# Altium PCB PCB.PcbDoc
Units mil, origin at the board's own origin, x right, y up, seen from the top; angles counter-clockwise.
Board outline 866.77 x 1869 mil, 2 copper layers (Top Layer, Bottom Layer); 32 components, 42 nets, 192 pads, 54 vias.
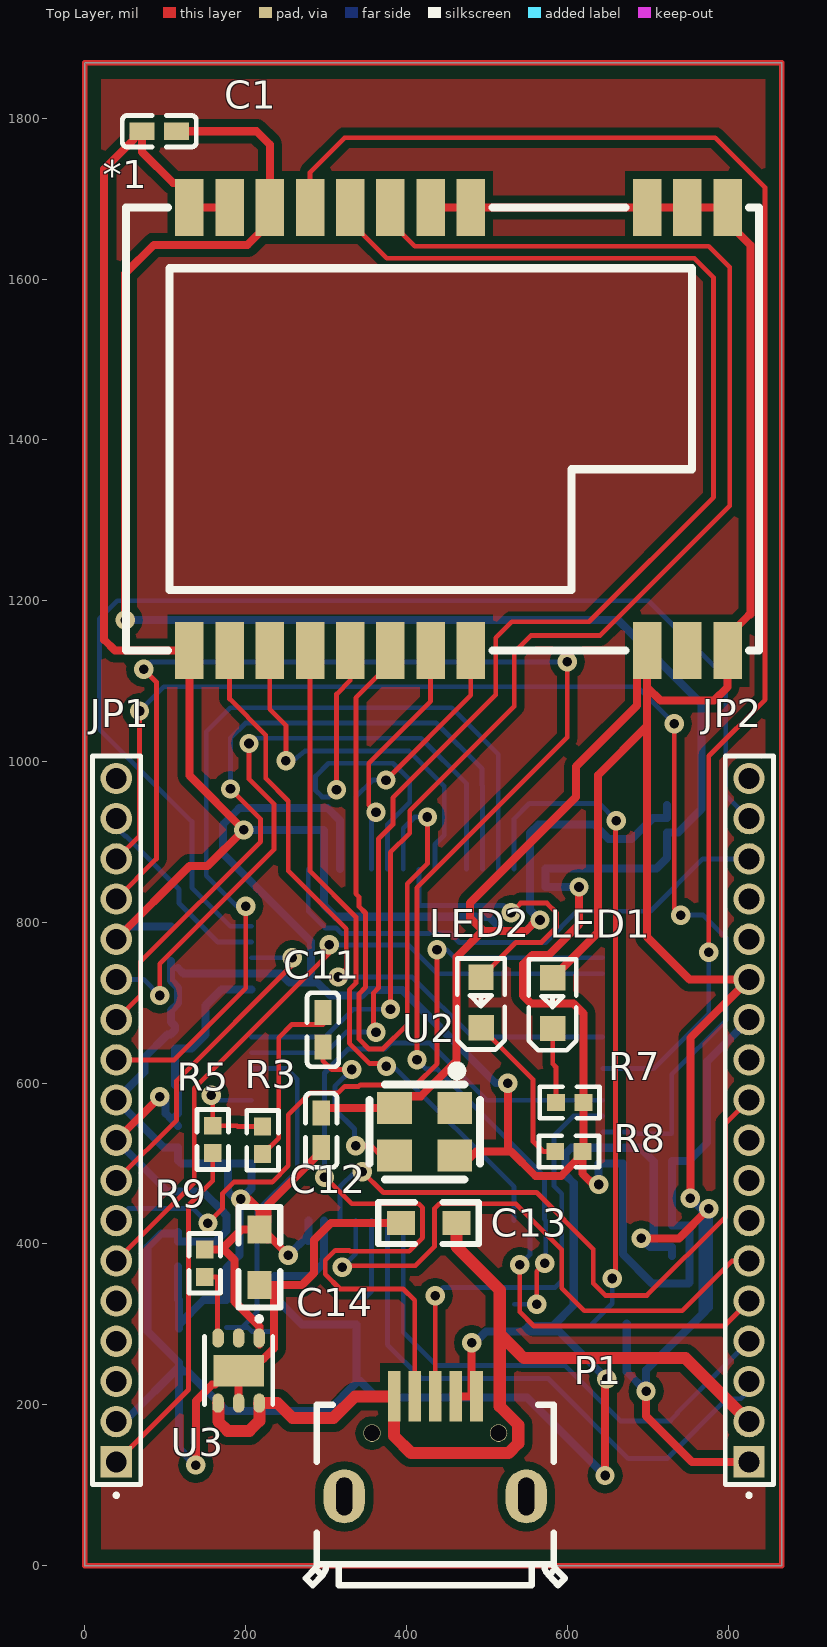
[diagram p0: Top Layer view]
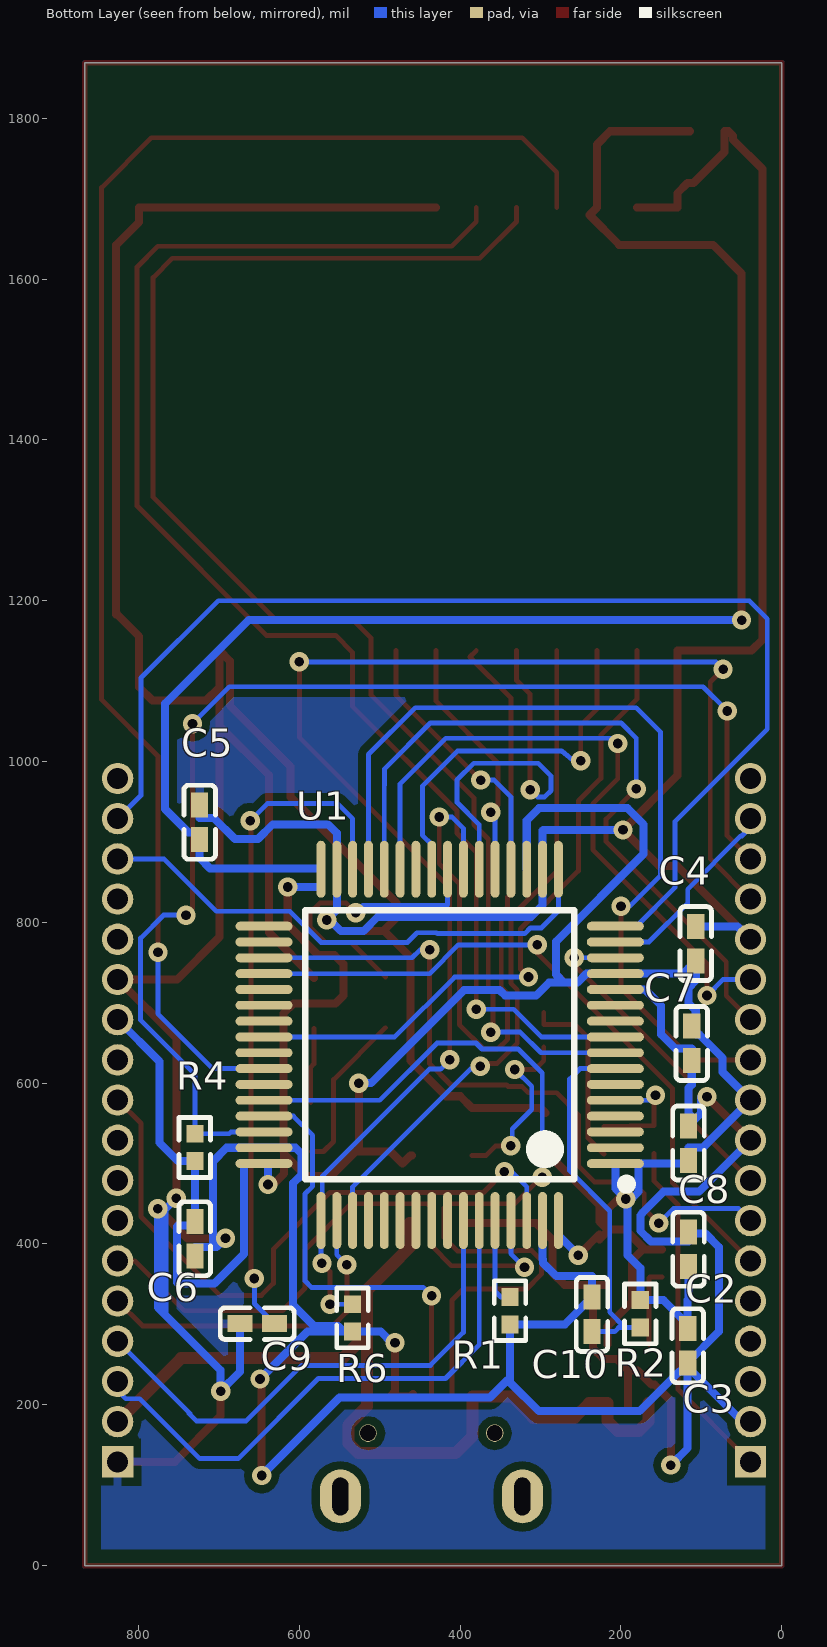
[diagram p1: Bottom Layer view, seen from below]

## Layer stack, top to bottom
Top Solder: solder mask 0.4, Solder Resist, Dk 3.5
Top Layer: signal copper 1.4
Dielectric 1: dielectric 12.6, FR-4, Dk 4.8
Bottom Layer: signal copper 1.4
Bottom Solder: solder mask 0.4, Solder Resist, Dk 3.5

## Board outline
0,0 0,1869 866.77,1869 866.77,0

## Design rules (kind name [scope] priority, off if disabled: settings)
Clearance [All] p1: gap=6 ignorepadtopadclearanceinfootprint=FALSE except(10: Arc-Poly Track-Poly SMDPad-Poly THPad-Poly Via-Poly Fill-Poly Poly-Poly)
MinimumSolderMaskSliver [All] p1: minsoldermaskwidth=0
PolygonConnect [All] p1: thpad.connectstyle=Relief thpad.reliefconductorwidth=10 thpad.reliefentries=4 thpad.polygonreliefangle="90 Angle" thpad.airgapwidth=10 smdpad.connectstyle=Relief smdpad.reliefconductorwidth=10 smdpad.reliefentries=4 smdpad.polygonreliefangle="90 Angle" smdpad.airgapwidth=10 via.connectstyle=NoConnect via.reliefconductorwidth=10 via.reliefentries=4 via.polygonreliefangle="90 Angle" via.airgapwidth=10
RoutingVias [All] p1: holewidth=12 width=24 viastyle="Through Hole" minholewidth=11 minwidth=27 maxholewidth=15 maxwidth=23
SilkToSilkClearance [All] p1: silktosilkclearance=0
SilkToSolderMaskClearance [IsPad] p1: minsilkscreentomaskgap=0 clearancetoexposedcopper=TRUE
SolderMaskExpansion [All] p1: expansion=4
Width Width_2 [(InNet('GND') OR InNet('VCC3V3'))] p1: maxlimit=10 minlimit=10 preferedwidth=10
Width Width_1 [InNet('+5V')] p2: maxlimit=18 minlimit=10 preferedwidth=15
Width [All] p3: maxlimit=10 minlimit=5 preferedwidth=6 minimp=50.000000 maximp=50.000000 favimp=50.000000
27 further rules are at their usual default settings.

## Components (designator, comment, footprint, x,y, rotation, side; value= is the part's Value field where it differs from the comment)
*1 "400M22S" E22_400M22S 663.66,1217.57 r90 top
C1 "0.1uF" "C 0402" 198.53,1816.37 r0 top
C2 "10uF" "C 0402" 83.63,287.55 r270 bottom
C3 "100mF" "C 0402" 149.37,379.45 r90 bottom
C4 "100mF" "C 0402" 74.63,667.55 r270 bottom
C5 "100mF" "C 0402" 691.63,818.55 r270 bottom
C6 "100mF" "C 0402" 762.37,512.53 r90 bottom
C7 "100mF" "C 0402" 144.37,755.45 r90 bottom
C8 "100mF" "C 0402" 83.63,419.55 r270 bottom
C9 "4.7uF" "C 0402" 546.47,333.37 r180 bottom
C10 "100mF" "C 0402" 268.37,418.45 r90 bottom
C11 "0.1uF" "C 0402" 263.63,772.45 r90 top
C12 "0.1uF" "C 0402" 326.37,435.47 r270 top
C13 "1uF" "C 0603" 428,426 r0 top
C14 "1uF" "C 0603" 217,384 r90 top
JP1 "HDR-1X14" "18p 1.27" -18285.63,22035.16 r90 top locked
JP2 "HDR-1X14" "18p 1.27" -17498.63,22035.16 r90 top locked
LED1 "LED" LED 504.18,607.88 r90 top
LED2 "LED" LED 415.18,608.88 r90 top
P1 "MICRO_USB" mircoUSB2 506,251.8 r90 top
R1 "1K" "R 0402" 370.37,336.87 r90 bottom
R2 "1K" "R 0402" 143.63,293.21 r270 bottom
R3 "0" "R 0402" 188.63,548.78 r90 top
R4 "10K" "R 0402" 697.63,500.22 r270 bottom
R5 "1K" "R 0402" 126.63,549.78 r90 top
R6 "10K" "R 0402" 501.63,288.21 r270 bottom
R7 "1K" "R 0402" 622.78,608.37 r0 top
R8 "1K" "R 0402" 621.86,547.37 r0 top
R9 "10K" "R 0402" 116.63,395.86 r90 top
U1 "STM32F412RET6" LQFP-64_10X10X05P 425.5,647.64 r0 bottom
U2 "TG2520SMN" TG25 311.49,576.34 r180 top
U3 "LP5912" lp5912 191.21,242.54 r270 top

## Footprints (in the part's own frame and the unit in brackets; to place one, negate y for a bottom-side part, rotate by r counter-clockwise, add the part's x,y. Pads: shape width x height; smd on the part's side, far side on the other; paste and mask are expansions set on the pad)
"18p 1.27" [mm]
  rect 0.99x0.99 hole 0.66: 1(-556.416,-465.446)
  round 0.99 hole 0.66: 2(-555.146,-465.446) 3(-553.876,-465.446) 4(-552.606,-465.446) 5(-551.336,-465.446) 6(-550.066,-465.446) 7(-548.796,-465.446) 8(-547.526,-465.446) 9(-546.256,-465.446) 10(-544.986,-465.446) 11(-543.716,-465.446) 12(-542.446,-465.446) 13(-541.176,-465.446) 14(-539.906,-465.446) 15(-538.636,-465.446) 16(-537.366,-465.446) 17(-536.096,-465.446) 18(-534.826,-465.446)
  silkscreen extent -557.53,-466.22 -534.12,-464.69
"C 0402" [mm]
  rect 0.79x0.54 smd: 1(-3.237,-0.822) 2(-2.147,-0.822)
  silkscreen extent -3.86,-1.32 -1.52,-0.32
"C 0603" [mil] "无极性贴片电容"
  rect 35x30 smd: 1(-35,0) 2(34,0)
  silkscreen extent -63,-26 62,26, body extent -31,-16 31,16, height 32
E22_400M22S [mm]
  rect 1.8x0.9 smd: 1(11.979,-3.445) 2(11.979,-2.175) 3(11.979,-0.905) 4(11.979,4.665) 5(11.979,5.935) 6(11.979,7.205) 7(11.979,8.475) 8(11.979,9.745) 9(11.979,11.015) 10(11.979,12.285) 11(11.979,13.555) 12(-2.021,13.555) 13(-2.021,12.285) 14(-2.021,11.015) 15(-2.021,9.745) 16(-2.021,8.475) 17(-2.021,7.205) 18(-2.021,5.935) 19(-2.021,4.665) 20(-2.021,-0.905) 21(-2.021,-2.175) 22(-2.021,-3.445)
  silkscreen extent -2.02,-4.45 11.98,15.55
LED [mm]
  rect 0.8x0.8 smd: 1(1.527,-1.977) 2(3.126,-1.97)
  silkscreen extent 0.84,-2.72 3.72,-1.22
lp5912 [mm]
  oval 0.607x0.364 smd: 1(-1.029,0.65) 2(-1.029,0) 3(-1.029,-0.65) 4(1.028,-0.65) 5(1.028,0) 6(1.028,0.65)
  rect 1x1.6 smd: 7(0,0)
  silkscreen extent -1.71,-1.08 1.08,1.08
LQFP-64_10X10X05P [mm]
  oval 1.8x0.28 smd: 1(-5.55,3.75) 2(-5.55,3.25) 3(-5.55,2.75) 4(-5.55,2.25) 5(-5.55,1.75) 6(-5.55,1.25) 7(-5.55,0.75) 8(-5.55,0.25) 9(-5.55,-0.25) 10(-5.55,-0.75) 11(-5.55,-1.25) 12(-5.55,-1.75) 13(-5.55,-2.25) 14(-5.55,-2.75) 15(-5.55,-3.25) 16(-5.55,-3.75) 33(5.55,-3.75) 34(5.55,-3.25) 35(5.55,-2.75) 36(5.55,-2.25) 37(5.55,-1.75) 38(5.55,-1.25) 39(5.55,-0.75) 40(5.55,-0.25) 41(5.55,0.25) 42(5.55,0.75) 43(5.55,1.25) 44(5.55,1.75) 45(5.55,2.25) 46(5.55,2.75) 47(5.55,3.25) 48(5.55,3.75)
  oval 0.28x1.8 smd: 17(-3.75,-5.55) 18(-3.25,-5.55) 19(-2.75,-5.55) 20(-2.25,-5.55) 21(-1.75,-5.55) 22(-1.25,-5.55) 23(-0.75,-5.55) 24(-0.25,-5.55) 25(0.25,-5.55) 26(0.75,-5.55) 27(1.25,-5.55) 28(1.75,-5.55) 29(2.25,-5.55) 30(2.75,-5.55) 31(3.25,-5.55) 32(3.75,-5.55) 49(3.75,5.55) 50(3.25,5.55) 51(2.75,5.55) 52(2.25,5.55) 53(1.75,5.55) 54(1.25,5.55) 55(0.75,5.55) 56(0.25,5.55) 57(-0.25,5.55) 58(-0.75,5.55) 59(-1.25,5.55) 60(-1.75,5.55) 61(-2.25,5.55) 62(-2.75,5.55) 63(-3.25,5.55) 64(-3.75,5.55)
  silkscreen extent -6.05,-4.25 4.25,4.55
mircoUSB2 [mm]
  rect 1.6x0.4 smd: 1(-1.047,3.083) 2(-1.047,2.433) 3(-1.047,1.783) 4(-1.047,1.133) 5(-1.047,0.483)
  oval 1.7x1.3 hole 0.5 slot 1.2 at 0 deg: SH1(-4.211,-1.092) SH2(-4.211,4.658)
  round 0.55 hole 0.5: SH3(-2.211,-0.217) SH4(-2.211,3.783)
  silkscreen extent -7.01,-2.31 -1.31,5.88
"R 0402" [mm]
  rect 0.566x0.54 smd: 1(-0.936,-0.822) 2(-0.071,-0.822)
  silkscreen extent -1.45,-1.32 0.44,-0.32
TG25 [mm]
  rect 1.1x1 smd: 1(-3.772,0.185) 2(-1.872,0.185) 3(-1.872,1.685) 4(-3.772,1.685)
  silkscreen extent -4.57,-1.14 -1.07,2.44

## Part data
C1 C2 C3 C4 C5 C6 C7 C8 C9 C10 C11 C12 C13 C14: library part C, "无极性贴片电容", 学习资源=www.o
JP1 JP2: library part "Header 18", "18P接插件", BOM名称=14, 学习资源=www.o
LED1 LED2: "贴片LED", 学习资源=www.o
R1 R2 R3 R4 R5 R6 R7 R8 R9: library part R, "贴片电阻", 学习资源=www.o
U1: library part STM32F412RET6_2

## Via types
v1: diameter 24, hole 12, Top Layer to Bottom Layer, 54 vias

## Nets (pads, with @x,y where several pads share a name; then routed paths per layer and width w, separated by ;. In a path a pad name is that pad's centre, name@x,y a point inside that pad or via, vN(x,y) a via of type N, cw(c..) or ccw(c..) an arc to the next point about the centre after c; other vN are vias at no path point)
1PPS_IN: JP2.5 U1.50 | length 423.9
  Top Layer w6: v1(540.95,374) 540.95,315.55 558.5,298 795,298 JP2.5
  Bottom Layer w6: v1(540.95,374) 553.45,386.5 U1.50
+5V: C13.2 JP2.2 P1.1 U3.4 U3.6 | length 1182.9
  Top Layer w15: U3.4 165.95,201.71 165.95,179.05 177.5,167.5 204.5,167.5 217,180 217,198 U3.6 239.65,202.05 257.97,183.73 309.23,183.73 336.07,210.57 P1.1 384.63,161 405.63,140 527,140 539,152 539,175 516,198 516,288 ; C13.2@470.39,418.5 462.89,426 C13.2 462,396.77 486.77,372 516,342.77 516,288 ; JP2.2 747,258 546,258 535.04,268.96 516,288
ASSIC: JP2.10 U1.62 | length 816
  Top Layer w6: v1(345,490) 371,464 562,464 632.36,393.64 632.36,350.95 647.3,336 699,336 797,434 797,550 JP2.10
  Bottom Layer w6: U1.62 317.23,471.1 336.13,490 v1(345,490)
BOOT0: R1.2 U1.60 | length 109.4
  Bottom Layer w6: R1.2 349.3,334.08 356.6,341.38 U1.60
GND: *1.1 *1.2 *1.3 *1.4 *1.5 *1.10 *1.11 *1.12 *1.20 *1.22 C1.1 C2.1 C3.1 C4.1 C5.1 C6.1 C7.1 C8.1 C9.1 C10.2 C12.1 C13.1 C14.1 JP1.2 JP1.9 JP1.14 JP2.1 JP2.13 LED1.2 P1.4 P1.5 R1.1 R6.2 U1.12 U1.18 U1.31 U1.47 U1.63 U2.2 U3.5 U3.7 | length 9824.6
  Top Layer w10: JP1.9 v1(93,583) ; JP1.14 130,870 152.5,870 v1(197.5,915) 130,982.5 *1.12 37.47,1138 24,1151.47 24,1736.92 60.53,1773.45 60.53,1778.37 66.16,1784 C1.1 71.08,1758.37 109.84,1719.62 117.28,1719.62 130,1706.9 *1.11 *1.10 ; v1(138,125) 138,204.9 158.09,225 161.86,225 179.4,242.54 U3.7@191,242.54 ; U3.5@191,198 U3.7@191,242.54 ; U3.7 U3.7@191,242.54 ; C14.1 233,349 ; C12.1 300.14,569.05 U2.2 399.87,583.74 417.79,583.74 462,627.95 462,756.71 495,789.71 ; C13.1 306,426 285,405 285,364 270,349 233,349 ; *1.5 *1.4 *1.3 *1.2 *1.1 799.29,1671 828,1642.29 828,1182.7 826.28,1182.7 799.29,1155.72 *1.22 799.29,1092.5 782.58,1075.79 716,1075.79 699.29,1092.5 ; P1.4@458.53,213.44 P1.4 P1.5 481,216.57 v1(481,277) ; v1(565.95,802.95) 562.16,802.95 548.21,789 495.71,789 495,789.71 ; LED1.2 638,787.23 638,983.06 699.29,1044.35 ; v1(647,112) 647,230 v1(649,232) ; v1(692,407) 739,407 v1(776,444) ; v1(698,217) 698,186 755,129 JP2.1 ; v1(753,457) 753,656 JP2.13 752,729 699.29,781.71 699.29,1044.35 ; U3.7@191,242.54 205.69,257.23 222.07,257.23 234.97,270.12 234.97,347.03 233,349 ; 495,789.71 479,805.71 479,824 611,956 611,994 686.58,1069.58 686.58,1125.28 *1.20 699.29,1092.5 ; 699.29,1044.35 699.29,1092.5
  Bottom Layer w10: JP1.2 44.54,184.55 54.47,184.55 C3.1@117,247.08 ; JP1.9 103,465 147,465 173,439 173,438.53 176,435.53 176,416.47 162.53,403 116,403 C2.1@116,413 ; JP1.14 55,795 C4.1 ; v1(93,583) 100.5,583 100.5,562.5 C8.1@108.25,554.75 ; C2.1 C2.1@116,413 ; C8.1 C8.1@108.25,554.75 ; v1(138,125) 117,146 C3.1@117,247.08 ; v1(197.5,915) 296.55,915 297.55,914 U1.18 297.55,821.35 311.9,807 502.47,807 520.47,789 548.21,789 562.16,802.95 v1(565.95,802.95) 553.45,815.45 U1.31 553.45,911.03 564.42,922 633.05,922 651.47,903.58 680.08,903.58 706.5,930 724,930 C5.1 ; U1.12 170,716.54 150,696.54 150,660.5 132.5,643 112,643 C7.1 112,598 116,594 116,562.5 C8.1@108.25,554.75 ; U1.63 297.55,381.08 297,380.53 297,376.5 280.5,360 236,360 C10.2 269.92,300 R1.1 338,227.84 ; v1(481,277) 484.79,277 498.79,291 R6.2 545,291 ; v1(647,112) 550,209 363,209 341.08,230.92 338,227.84 ; v1(649,232) 590,291 545,291 ; C9.1 673.92,241.08 v1(698,217) 698,243 768,313 ; v1(692,407) 703,396 C6.1@730,396 ; C6.1 C6.1@730,396 ; v1(753,457) 768,442 768,313 ; v1(776,444) 776,321 768,313 ; C2.1@116,413 95,413 78,396 78,291.37 117,252.37 C3.1 C3.1@117,247.08 ; C3.1@117,247.08 122.63,241.45 127.55,241.45 177,192 302.16,192 338,227.84 ; 545,291 552,298 582,298 608,324 608,475.57 597.57,486 597.57,512.26 605,519.69 U1.47 690.5,519.69 707.5,502.69 707.5,397 C6.1@730,396
GpsSyncOn: JP2.6 U1.61 | length 740.4
  Top Layer w6: v1(320,371) 322,373 411,373 435,397 435,444.23 440.77,450 536,450 593,393 593,345 621,317 743,317 805,379 JP2.6
  Bottom Layer w6: v1(320,371) 336.92,387.92 U1.61
HpSync: JP1.17 U1.15 | length 248.2
  Bottom Layer w6: JP1.17 39,918 49.51,907.49 50.8,907.49 117,841.29 117,823.91 165.32,775.59 U1.15
LED_SYNC: LED2.2 U1.24 | length 367
  Top Layer w6: LED2.2 535.77,775 567.7,775 586.95,794.25 586.95,811.65 574.65,823.95 541.95,823.95 v1(530,812)
  Bottom Layer w6: U1.24 415.66,822 416.66,821 521,821 v1(530,812)
LORA_BUSY: *1.14 U1.25 | length 475.8
  Top Layer w6: *1.14 230,1065 250,1045 v1(250,1001)
  Bottom Layer w6: v1(250,1001) 254,997 273.69,1013 403.5,1013 447,969.5 447,908.55 435.34,896.89 U1.25
LORA_CS: *1.19 U1.20 | length 340.9
  Top Layer w6: v1(374.5,977) 480,1082.5 *1.19
  Bottom Layer w6: U1.20 336.92,956.17 357.75,977 v1(374.5,977)
LORA_DIO1: *1.13 U1.40 | length 830.1
  Top Layer w6: *1.13 180,1078 225,1033 225,979 253,951 253,864 325,792 325,742 v1(315,732)
  Bottom Layer w6: v1(315,732) 407,732 481.52,657.48 U1.40
LORA_DIO2: *1.8 U1.42 | length 1870.1
  Top Layer w6: *1.8 280,1733 323,1776 784,1776 846,1714 846,1077 775.94,1006.94 v1(775.94,763)
  Bottom Layer w6: U1.42 707.5,618.11 775.94,686.55 v1(775.94,763)
LORA_MISO: *1.16 U1.22 | length 485.9
  Top Layer w6: v1(313,965) 313,1084 330,1101 *1.16
  Bottom Layer w6: v1(313,965) 304,956 295,956 287,964 287,982 303,998 383.2,998 404,977.2 404,949.3 376.29,921.59 U1.22
LORA_MOSI: *1.17 U1.23 | length 948.7
  Top Layer w6: *1.17 387.94,1130.06 337,1079.12 337,835.52 341,831.52 341,819.68 349,811.68 349,719.33 341,711.33 341,654.8 353.3,642.5 370.7,642.5 401,672.8 401,847.97 426,872.97 v1(426,931)
  Bottom Layer w6: U1.23 395.97,916.97 410,931 v1(426,931)
LORA_RST: *1.15 U1.51 | length 835.9
  Top Layer w6: *1.15 280,863.71 337,806.71 337,724.3 329,716.3 329,649.83 354.39,624.44 371.56,624.44 v1(375,621)
  Bottom Layer w6: v1(375,621) 378.44,617.56 387.31,617.56 533.77,471.1 U1.51
LORA_RXEN: *1.6 U1.9 | length 1798.6
  Top Layer w6: v1(380,692) 380,887 404,911 404,938.7 534,1068.7 534,1136 555,1157 641,1157 802,1318 802,1615 776,1641 410.47,1641 380,1671.47 *1.6
  Bottom Layer w6: U1.9 299,657.48 333.52,692 v1(380,692)
LORA_SCK: *1.18 U1.21 | length 309.7
  Top Layer w6: v1(362,937) 353,946 353,998 430,1075 *1.18
  Bottom Layer w6: U1.21 356.6,931.6 v1(362,937)
LORA_TXEN: *1.7 U1.8 | length 1835.3
  Top Layer w6: *1.7 330,1671.47 375.47,1626 758,1626 782,1602 782,1329 627,1174 531,1174 511,1154 511,1083 383,955 383,921.74 365,903.74 365,718.36 359,712.36 359,666.5 v1(362,663.5)
  Bottom Layer w6: U1.8 299.5,637.8 325.2,663.5 v1(362,663.5)
NetC9_2: C9.2 U1.30 | length 844.7
  Top Layer w6: v1(656,357) 660,361 660,925.58 v1(661,926.58)
  Bottom Layer w6: U1.30 533.77,928.77 553,948 639.58,948 v1(661,926.58) ; C9.2 656,326 v1(656,357)
NetC11_1: C11.1 U2.3 | length 225.1
  Top Layer w6: C11.1 296,628.13 307.13,617 v1(332,617) ; v1(337.05,522) 356,522 368,510 U2.3
  Bottom Layer w6: v1(332,617) 311,596 311,567.3 335.3,543 335.3,523.75 v1(337.05,522)
NetC11_2: C11.2 R3.1 | length 229.9
  Top Layer w6: R3.1 221.41,511.92 241,531.51 241,656.5 257.5,673 296,673 C11.2
NetLED1_1: LED1.1 R7.1 | length 93.6
  Top Layer w6: LED1.1 582,623.92 585.92,620 R7.1
NetLED2_1: LED2.1 R8.1 | length 200.9
  Top Layer w6: LED2.1 557.5,604.5 557.5,527.5 570,515 R8.1
NetR9_1: R9.1 U3.3 | length 99.6
  Top Layer w6: R9.1 164,359 165,358 U3.3@165,274.78
NRST: C10.1 R2.2 U1.7 | length 462.1
  Bottom Layer w6: R2.2 195,296 ; U1.7 251,618.11 264,605.11 264,491 214,441 214,315 195,296 ; C10.1 208,291 203,296 195,296
OSC: R3.2 R5.2 U1.5 | length 153.8
  Top Layer w6: v1(157,585) 159,583 R5.2 189,547 190,546 R3.2
  Bottom Layer w6: v1(157,585) 163.26,578.74 U1.5
OSC_IN: JP1.1 R5.1 | length 443.9
  Top Layer w6: JP1.1 JP1.1@52,129 ; JP1.1@45.5,129 45.5,135.5 129,219 129,239 129,448.5 159,478.5 R5.1
PB1: JP1.13 U1.27 | length 850.5
  Top Layer w6: v1(93,709) 93,748.36 235,890.36 235,947.5 204,978.5 v1(204,1022.5)
  Bottom Layer w6: JP1.13 73,729 v1(93,709) ; v1(204,1022.5) 210.5,1029 418,1029 474.71,972.29 U1.27
PB2: JP1.12 U1.28 | length 909.5
  Top Layer w6: JP1.12 69,709 69,751 218.5,900.5 218.5,928.5 v1(181,966)
  Bottom Layer w6: v1(181,966) 181,1029.2 199.8,1048 437,1048 494,991 494,971 494.4,970.6 U1.28
PB10: JP1.11 U1.29 | length 1085.9
  Top Layer w6: JP1.11 111,629 200,718 v1(200,820)
  Bottom Layer w6: v1(200,820) 189,820 151,858 151,1037 181,1067 456,1067 514.08,1008.92 U1.29
"PPS Out": JP1.8 U1.14 | length 418.6
  Top Layer w6: JP1.8 114,554 114,603 258,747 v1(258,755.91)
  Bottom Layer w6: U1.14 v1(258,755.91)
RSTN: JP1.6 U1.36 | length 857.6
  Top Layer w6: JP1.6 136,476 136,593.7 304,761.7 v1(304,772)
  Bottom Layer w6: v1(304,772) 402.3,772 438.08,736.22 U1.36
SWCLK: JP1.15 R6.1 U1.49 | length 1827.7
  Top Layer w6: JP1.15 89,879 89,1099 v1(73,1115) ; v1(413,629) 413,843 600,1030 v1(600,1124) ; v1(562,325) 562,366 v1(572,376)
  Bottom Layer w6: v1(73,1115) 82,1124 v1(600,1124) ; v1(413,629) 424.44,617.56 438.44,617.56 571.57,484.43 571.57,430.71 U1.49 573.14,377.14 v1(572,376) ; R6.1 561.92,325.08 v1(562,325)
SWDIO: JP1.16 R4.1 U1.46 | length 1560.4
  Top Layer w6: JP1.16 68,908 v1(68,1063) ; v1(733,1047) 733,817 v1(741,809)
  Bottom Layer w6: v1(68,1063) 98,1093 687,1093 v1(733,1047) ; U1.46 685,539.37 687.29,537.08 R4.1 730,611 797.51,678.51 797.51,780.49 769,809 v1(741,809)
"Sync On": JP1.7 U1.35 | length 895
  Top Layer w6: v1(153,426) 171,444 171,462.7 185.3,477 232.78,477 253,497.22 253,560.83 280.17,588 314,588 315.13,588 323.22,596.09 323.3,596 340.7,596 342.44,597.74 411.44,597.74 438,624.3 v1(438,766)
  Bottom Layer w6: JP1.7 54,444 135,444 v1(153,426) ; v1(438,766) 449.87,766 459.96,755.91 461.09,755.91 U1.35
UART1_RX: JP2.3 U1.59 | length 709.3
  Bottom Layer w6: U1.59 376.29,274.71 418.29,232.71 576.29,232.71 676,133 724,133 798.49,207.49 815.89,207.49 826,217.6 JP2.3
UART1_TX: JP2.4 U1.58 | length 658.1
  Bottom Layer w6: U1.58 395.97,290.03 436.97,249.03 596.97,249.03 666,180 728.18,180 737.41,189.24 736.23,189.24 JP2.4
UART2_RX: JP2.16 U1.17 | length 660.3
  Bottom Layer w6: U1.17 277.86,814.14 299,793 312.7,793 319.7,786 428.3,786 429.3,787 453.7,787 465.7,775 573,775 611.88,813.88 703.48,813.88 768.6,879 JP2.16
UART2_TX: JP2.17 U1.16 | length 1491.1
  Bottom Layer w6: U1.16 180.72,795.28 133,843 133,925.29 18,1040.29 18,1177.7 40.3,1200 701,1200 797,1104 797,958 JP2.17
USB_DM: P1.2 U1.44 | length 1090.4
  Top Layer w6: v1(298,483) 299,483 332,450 415,450 420,445 420,407.77 403.23,391 329.7,391 328.7,392 311.3,392 310.3,391 299,379.7 299,362.3 317.3,344 396,344 410.22,329.78 P1.2
  Bottom Layer w6: v1(298,483) 298,612.7 327.8,642.5 372.87,642.5 380.37,650 428.74,650 500,578.74 U1.44
USB_DP: P1.3 U1.45 | length 545.5
  Top Layer w6: v1(435.59,335.59) 435.81,335.37 P1.3
  Bottom Layer w6: v1(435.59,335.59) 446,346 585,346 593,354 593,462.33 583.57,471.76 583.57,535.13 607.5,559.06 U1.45
VCC3V3: *1.9 C1.2 C2.2 C3.2 C4.2 C5.2 C6.2 C7.2 C8.2 C12.2 C14.2 JP1.10 JP2.12 R2.1 R4.2 R7.2 R8.2 R9.2 U1.1 U1.13 U1.19 U1.32 U1.48 U1.64 U2.4 U3.1 | length 5779.5
  Top Layer w10: v1(50,1176) 50,1607 85.75,1642.75 202.27,1642.75 239.35,1679.83 *1.9 230,1767.5 213.5,1784 C1.2 ; R9.2 170,393.08 ; v1(194,456) 203.5,456 217,442.5 C14.2 ; U3.1@217,274.78 217,297.5 186,328.5 186,380 172.92,393.08 170,393.08 ; v1(253,386) 227,412 227,405.5 217,415.5 C14.2 ; C12.2@294,523 C12.2 294,515.08 227,448.08 227,428 C14.2 ; U2.4 461.97,510 471.81,500.16 486.65,515 530,515 560.18,484.82 592.45,484.82 618.45,511.25 R8.2 ; 526,515 v1(526,600) ; v1(614.5,844) 614.5,797.2 576.88,759.58 556.58,759.58 545,748 545,709 555,699 607.5,699 620,686.5 R7.2 620,515.92 R8.2 ; v1(639,474) 632.5,474 619.08,487.42 R8.2 ; 170,393.08 194.92,418 C14.2
  Bottom Layer w10: v1(50,1176) 663,1176 767,1072 767,941 738,912 724,912 C5.2 724,880 711,867 573.14,867 U1.32 573.14,844 v1(614.5,844) ; C4.2 107,727.53 116,718.53 116,699.47 107,690.47 107,675.92 C7.2 112,666 106.37,660.37 102.63,660.37 73.82,631.56 73.82,613.82 JP1.10 98,520 116,520 C8.2 120.08,500 U1.1@178,500 ; C2.2 116,331.08 117,330.08 C3.2@117,299.84 ; C4.2@116,743 122.78,736.22 U1.13 243,736.22 254.22,725 271,725 ; C3.2 C3.2@117,299.84 ; v1(194,456) 207,469 U1.1 U1.1@178,500 ; v1(253,386) 277.39,410.39 277.39,403.61 277.86,404.08 277.86,406 U1.64 ; U1.19 317.23,926.77 302,942 191.97,942 172,922.03 172,885 281,776 281,735 271,725 ; v1(526,600) 511,600 395,716 351,716 344,709 305.47,709 289.47,725 271,725 ; v1(639,474) 639,500 U1.48 669,500 669,387.5 705.5,351 751,351 752,352 752,422 751,423 730,423 C6.2 R4.2 751,503 774,526 774,627 JP2.12 ; C3.2@117,299.84 147.24,330.08 R2.1 176,370 192,386 192,451 178,465 U1.1@178,500
pads on no net: *1.21 JP1.3 JP1.4 JP1.5 JP1.18 JP2.7 JP2.8 JP2.9 JP2.11 JP2.14 JP2.15 JP2.18 P1.SH1 P1.SH2 P1.SH3 P1.SH4 U1.2 U1.3 U1.4 U1.6 U1.10 U1.11 U1.26 U1.33 U1.34 U1.37 U1.38 U1.39 U1.41 U1.43 U1.52 U1.53 U1.54 U1.55 U1.56 U1.57 U2.1 U3.2
copper on no net: | length 5471.5
  Top Layer w7: 0,0 866.77,0 866.77,95 866.77,1869 0,1869 0,95 0,0

## Polygon pours and split planes (outlines as drawn)
GND on Top Layer "Top Layer-GND" (solid, remove dead copper, pour order 10): 0,0 866.77,0 866.77,1869 0,1869
no net on Top Layer "Top Layer-No Net 3" (solid, pour order 6): -2,1867 0,1869 866.77,1869 866.77,0 0,0
no net on Top Layer "Top Layer-No Net 1" (solid, pour order 12): 50,1829
no net on Top Layer "Top Layer-No Net 2" (solid, pour order 8): 0,0
no net on Top Layer "Top Layer-No Net" (solid, pour order 0): 0,1869 -2,1867 -2,8
GND on Bottom Layer "Bottom Layer-GND" (solid, remove dead copper, pour order 14): 0,0 866.77,0 866.77,1869 0,1869